# Altium PCB 100064667.PcbDoc (part 1 of 2)
Units mil, origin at the board's own origin, x right, y up, seen from the top; angles counter-clockwise.
Board outline 1193.35 x 1920 mil, 8 copper layers (F.Cu, In1.Cu, In2.Cu, In3.Cu, ln4.Cu, In5.Cu, In6.Cu, B.Cu), stack 57.778 mil thick; 91 components, 64 nets, 294 pads, 112 vias.
Unrouted connection lines stored in the file: 2.
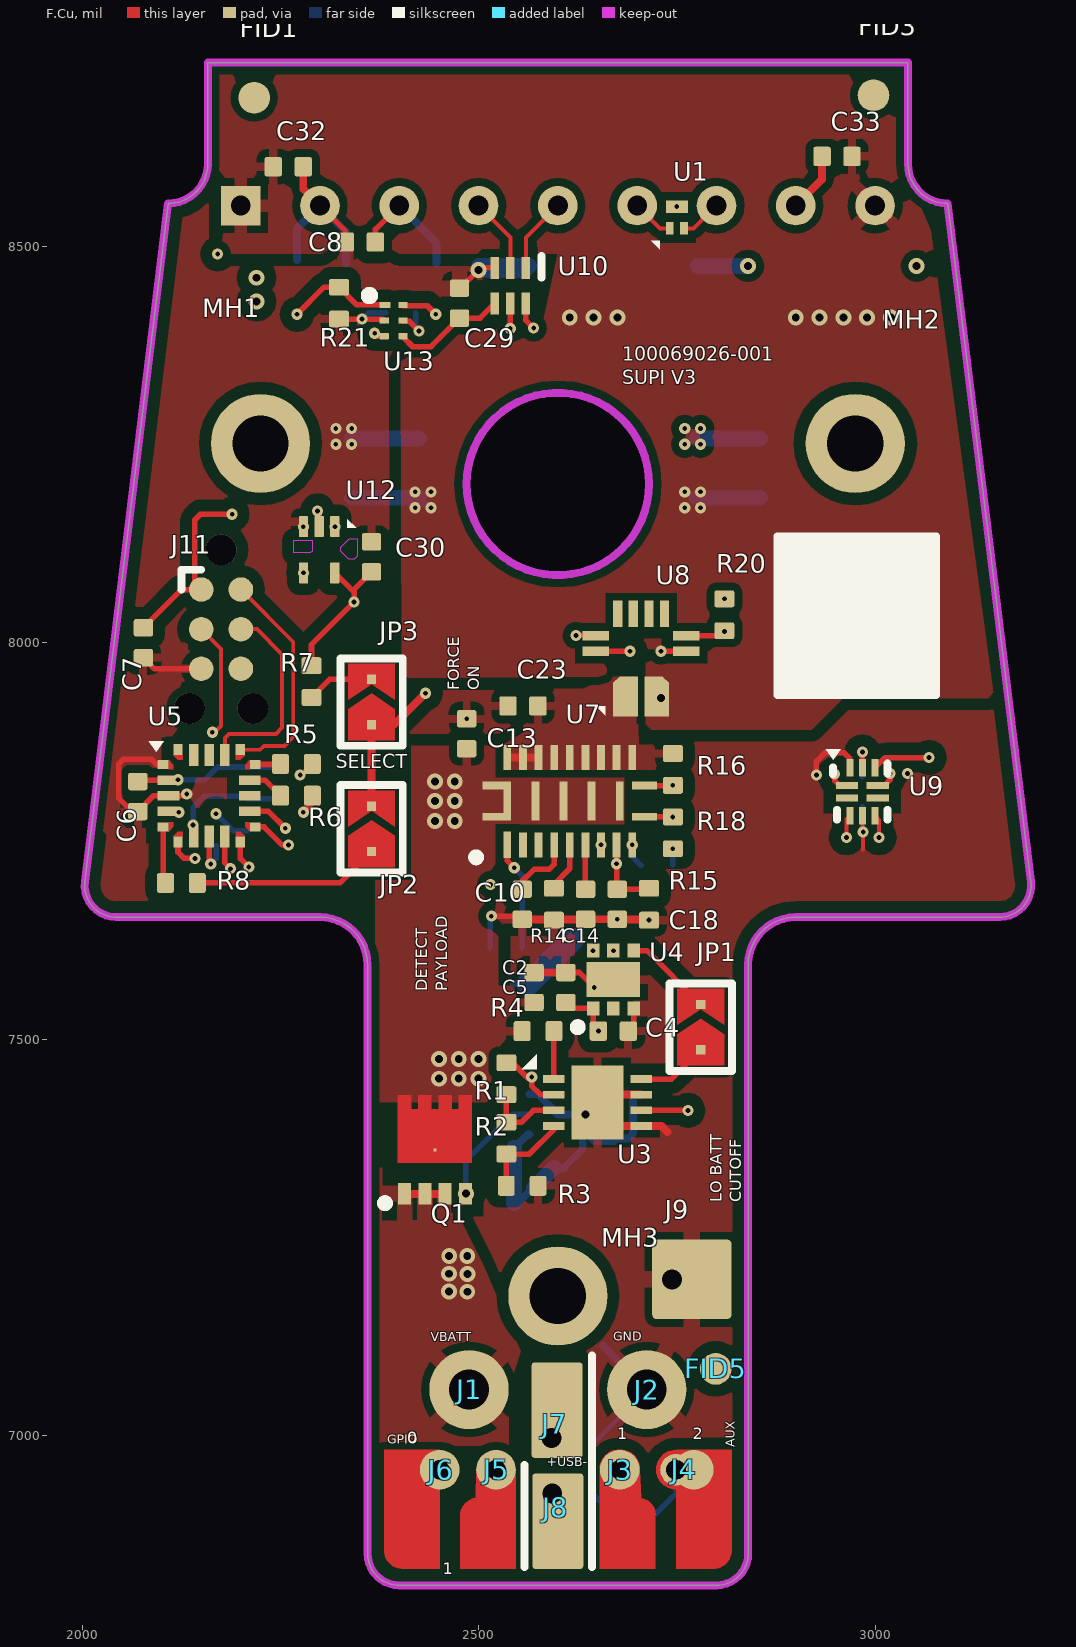
[diagram p0: F.Cu view]
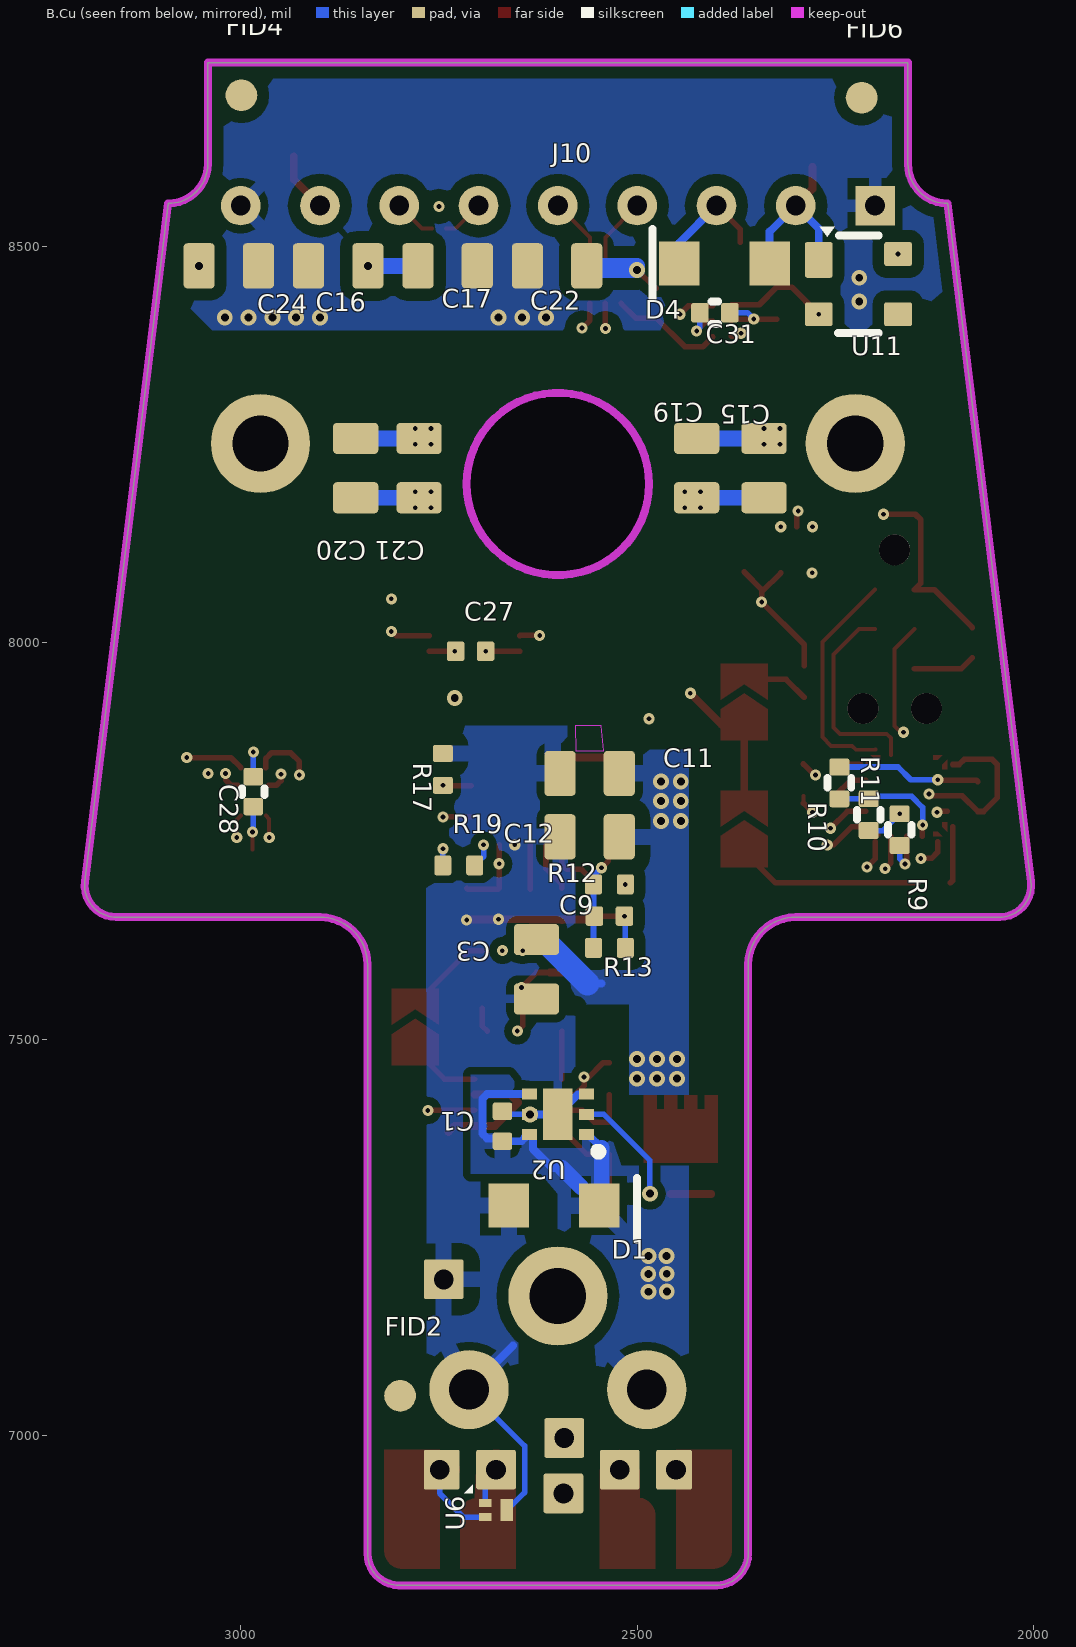
[diagram p1: B.Cu view, seen from below]
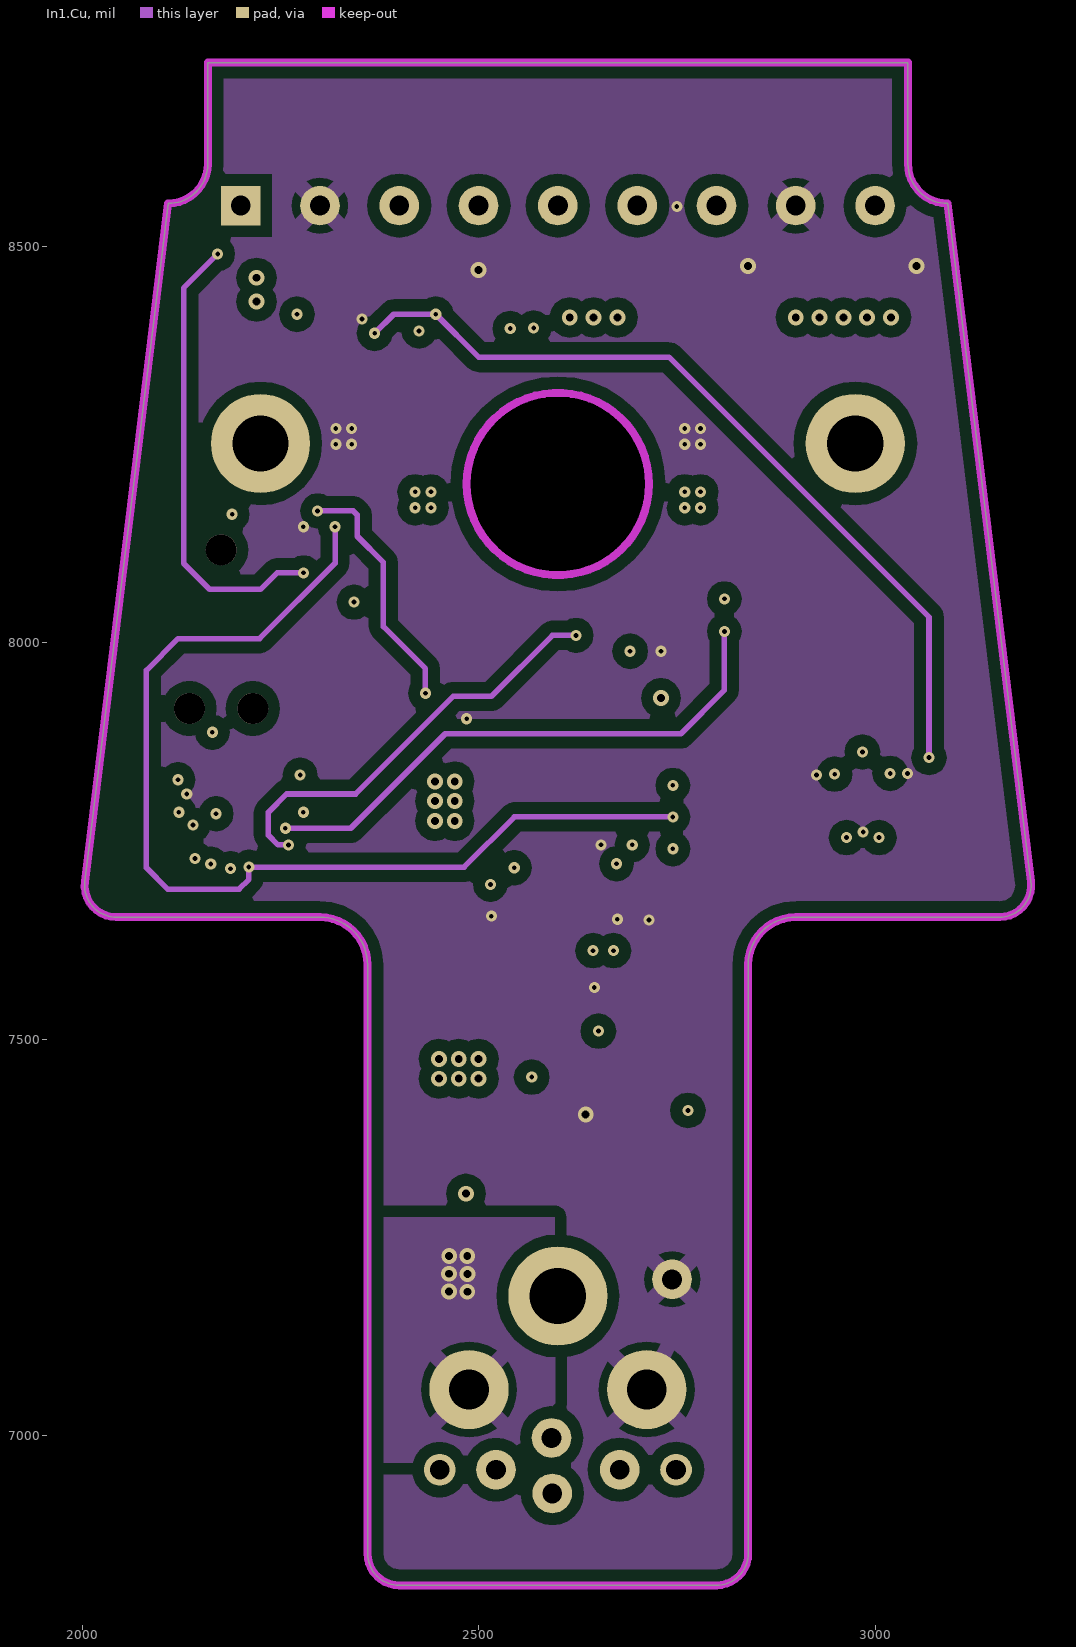
[diagram p2: In1.Cu]
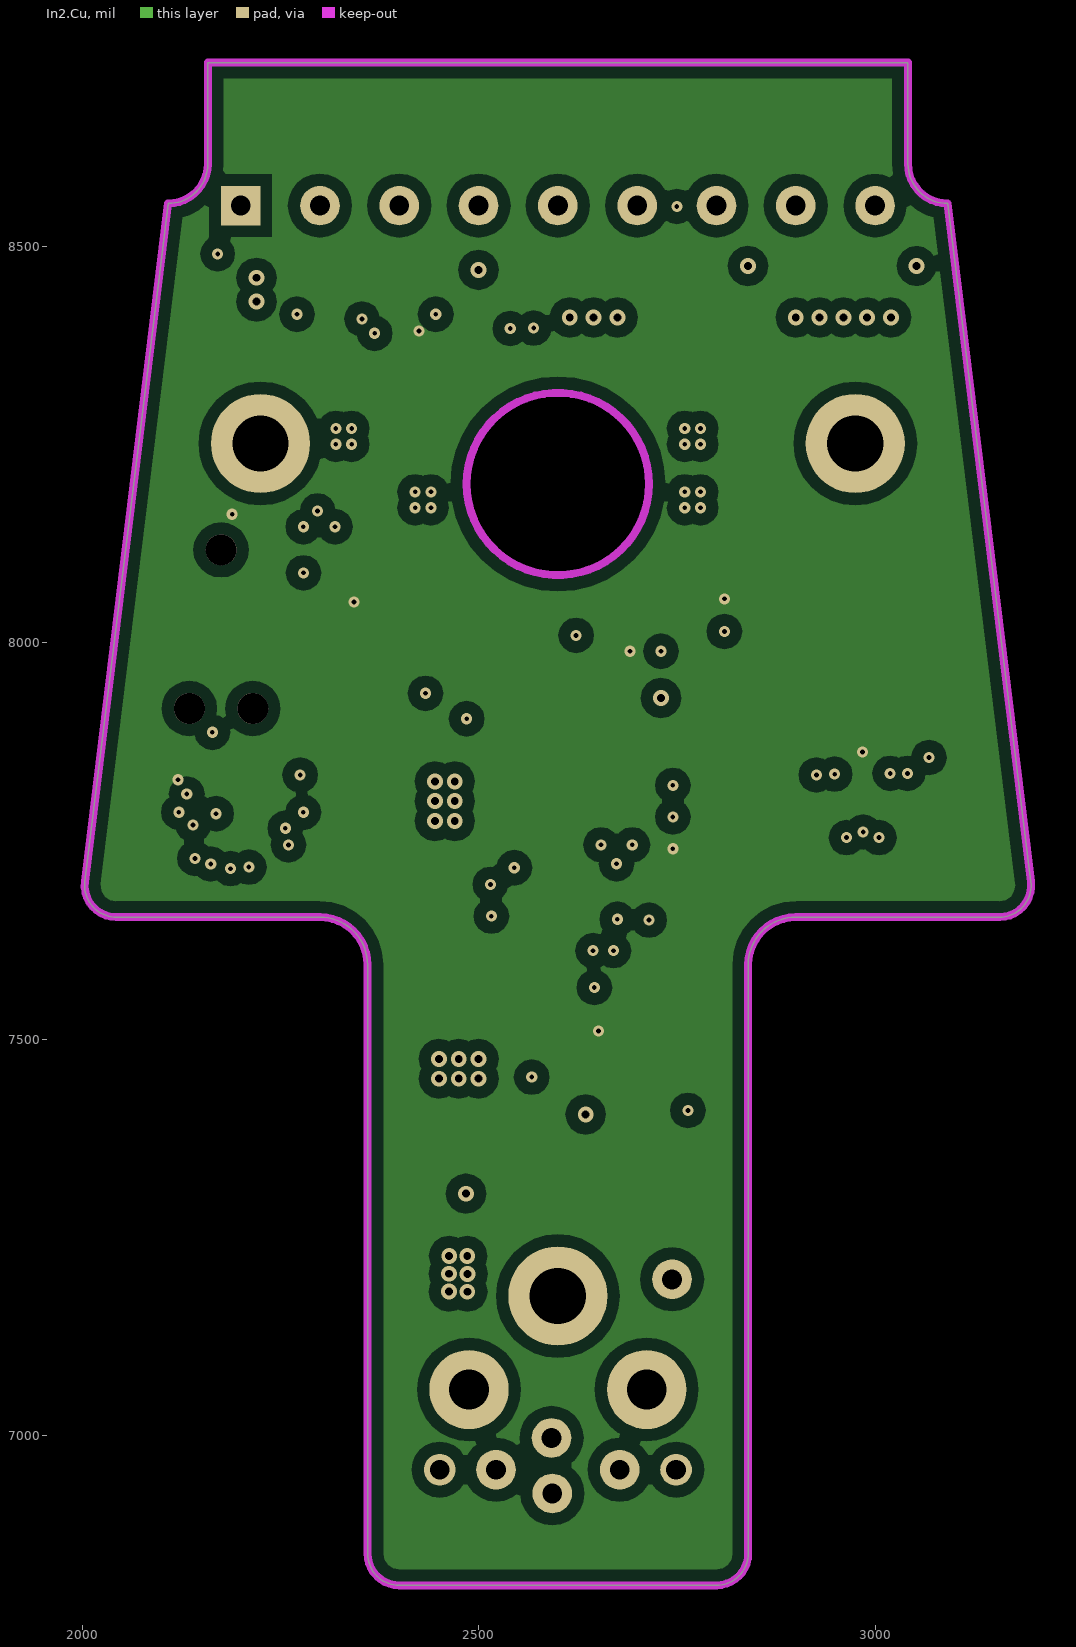
[diagram p3: In2.Cu]
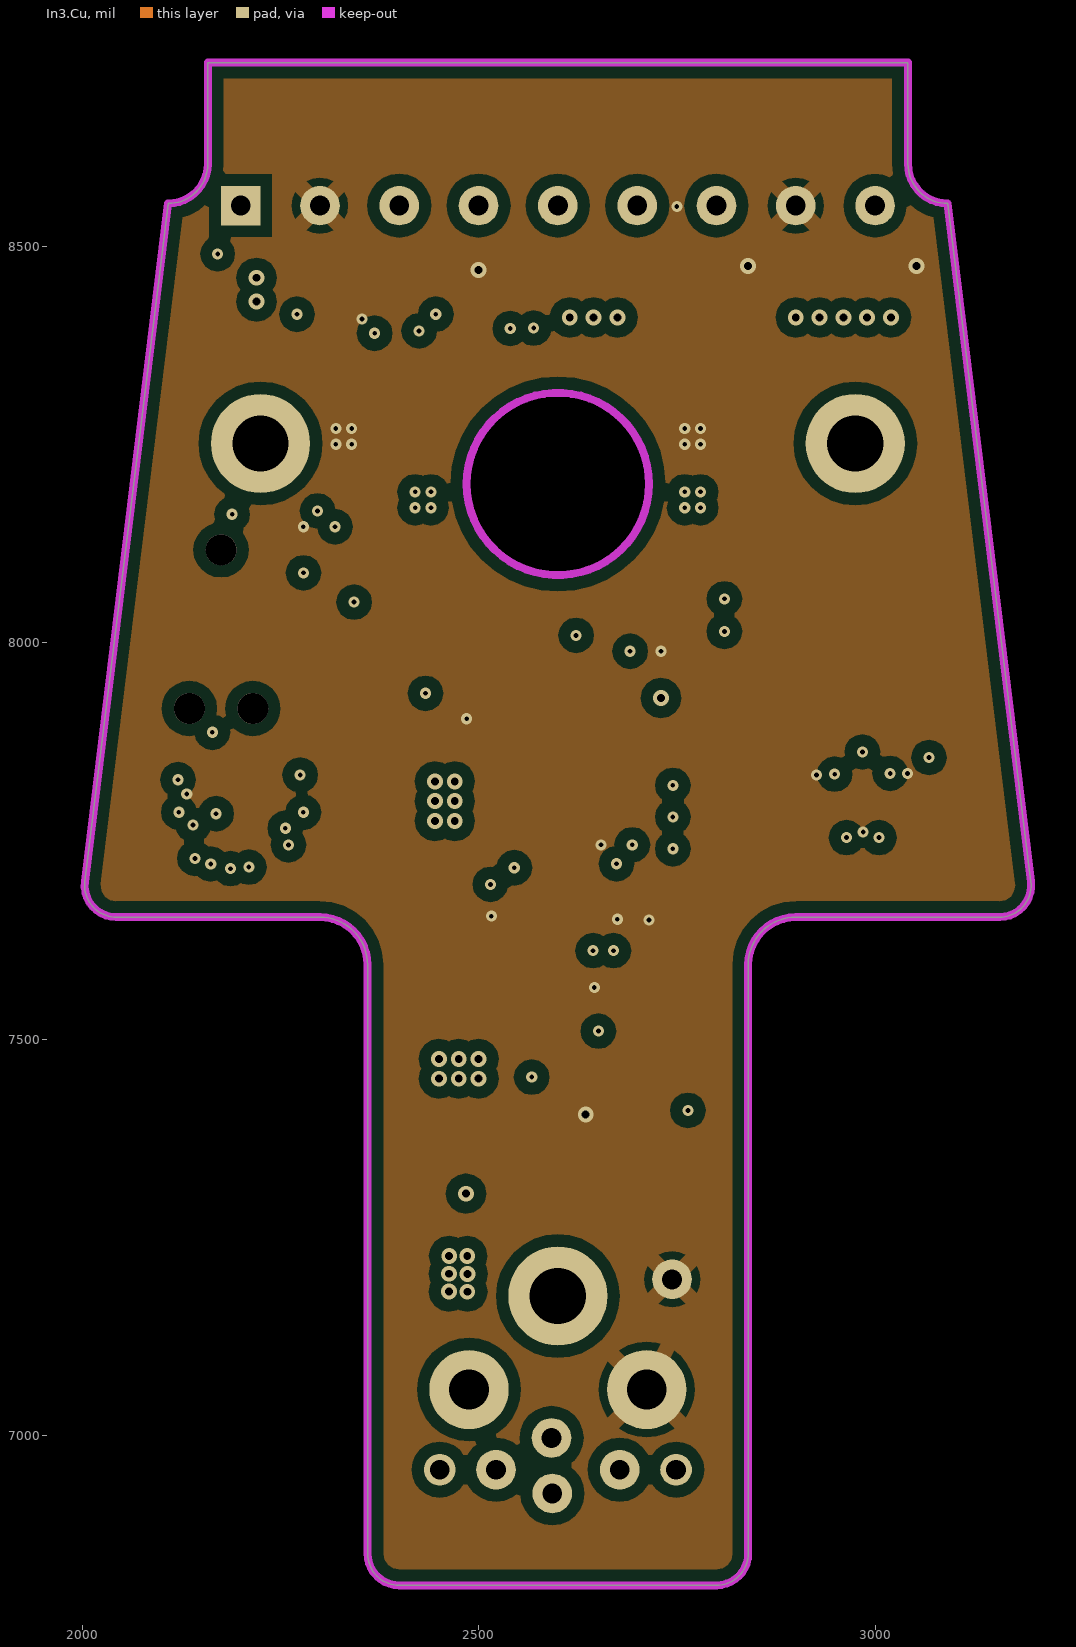
[diagram p4: In3.Cu]
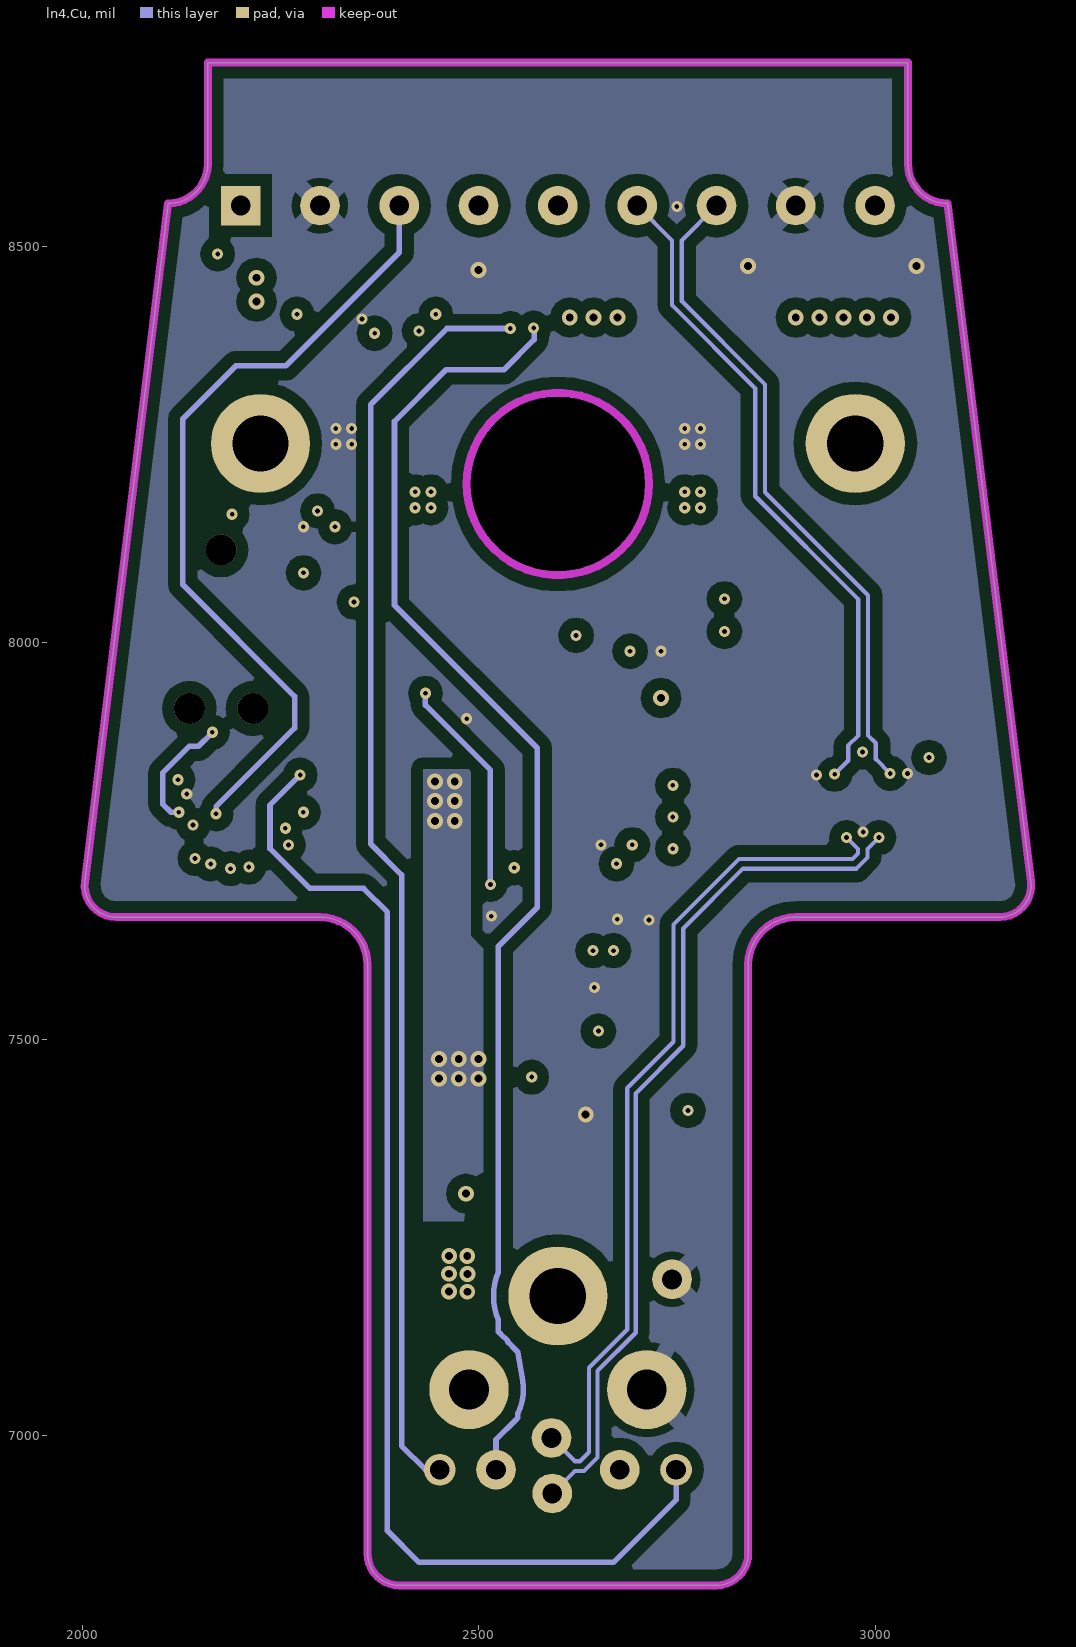
[diagram p5: ln4.Cu]
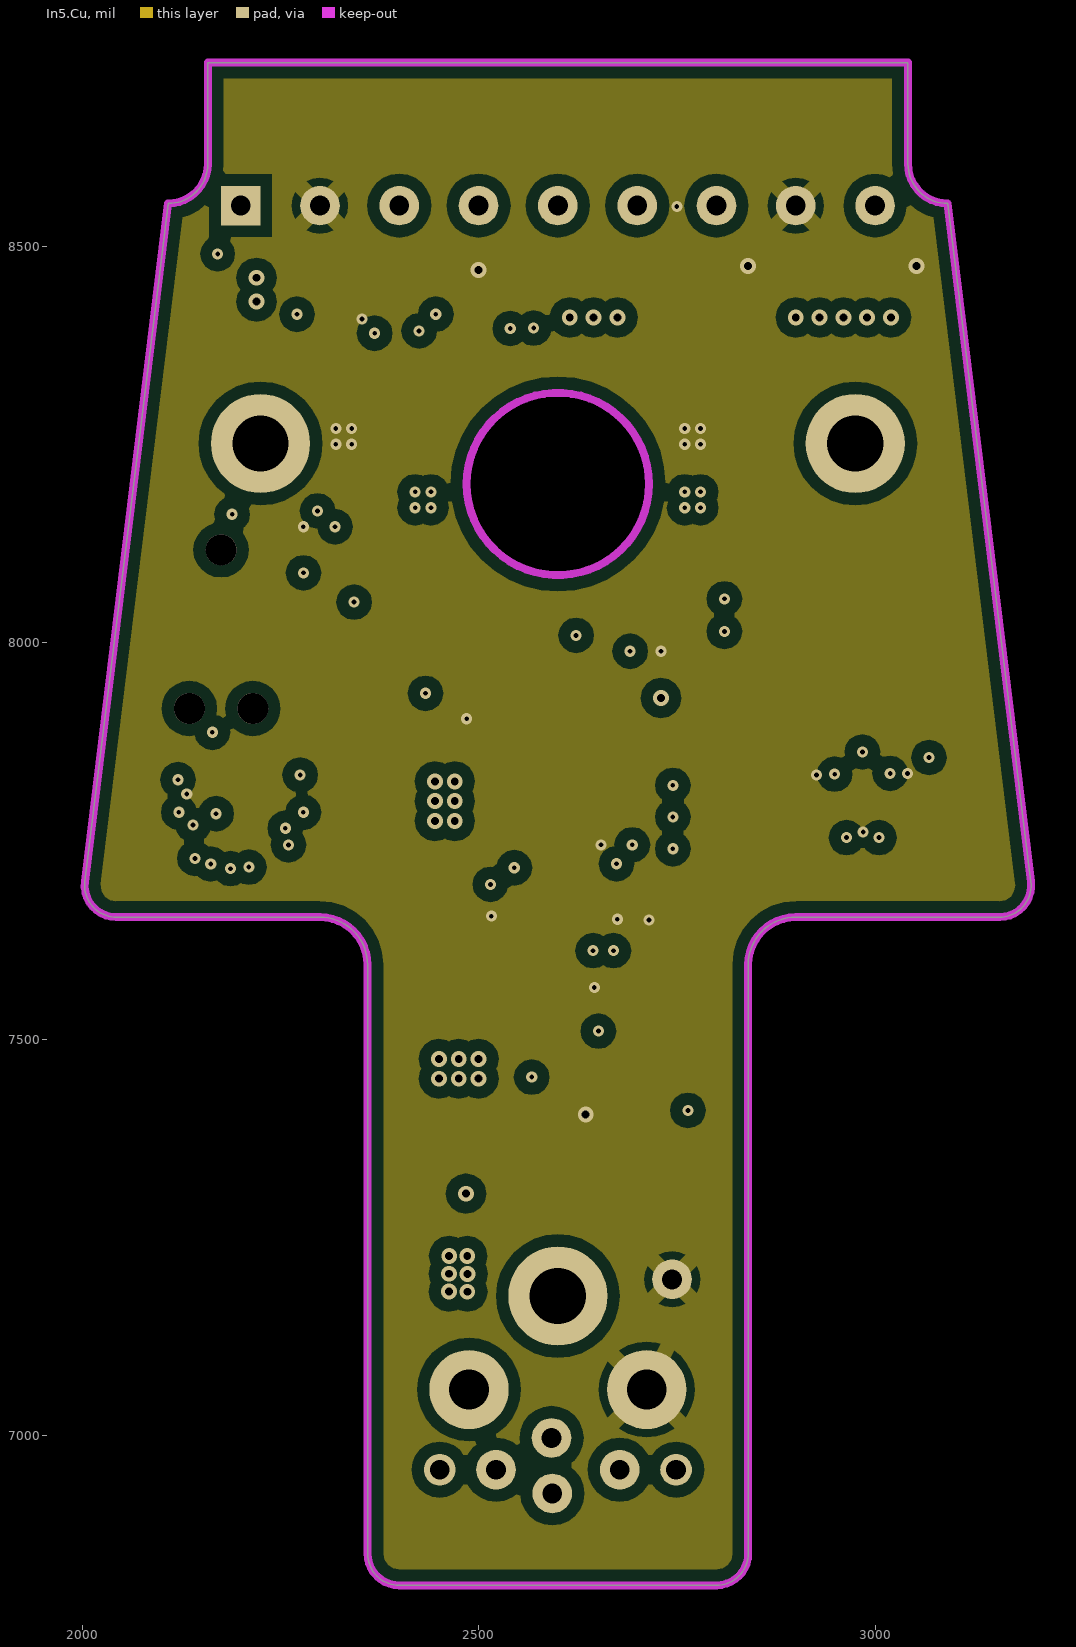
[diagram p6: In5.Cu]
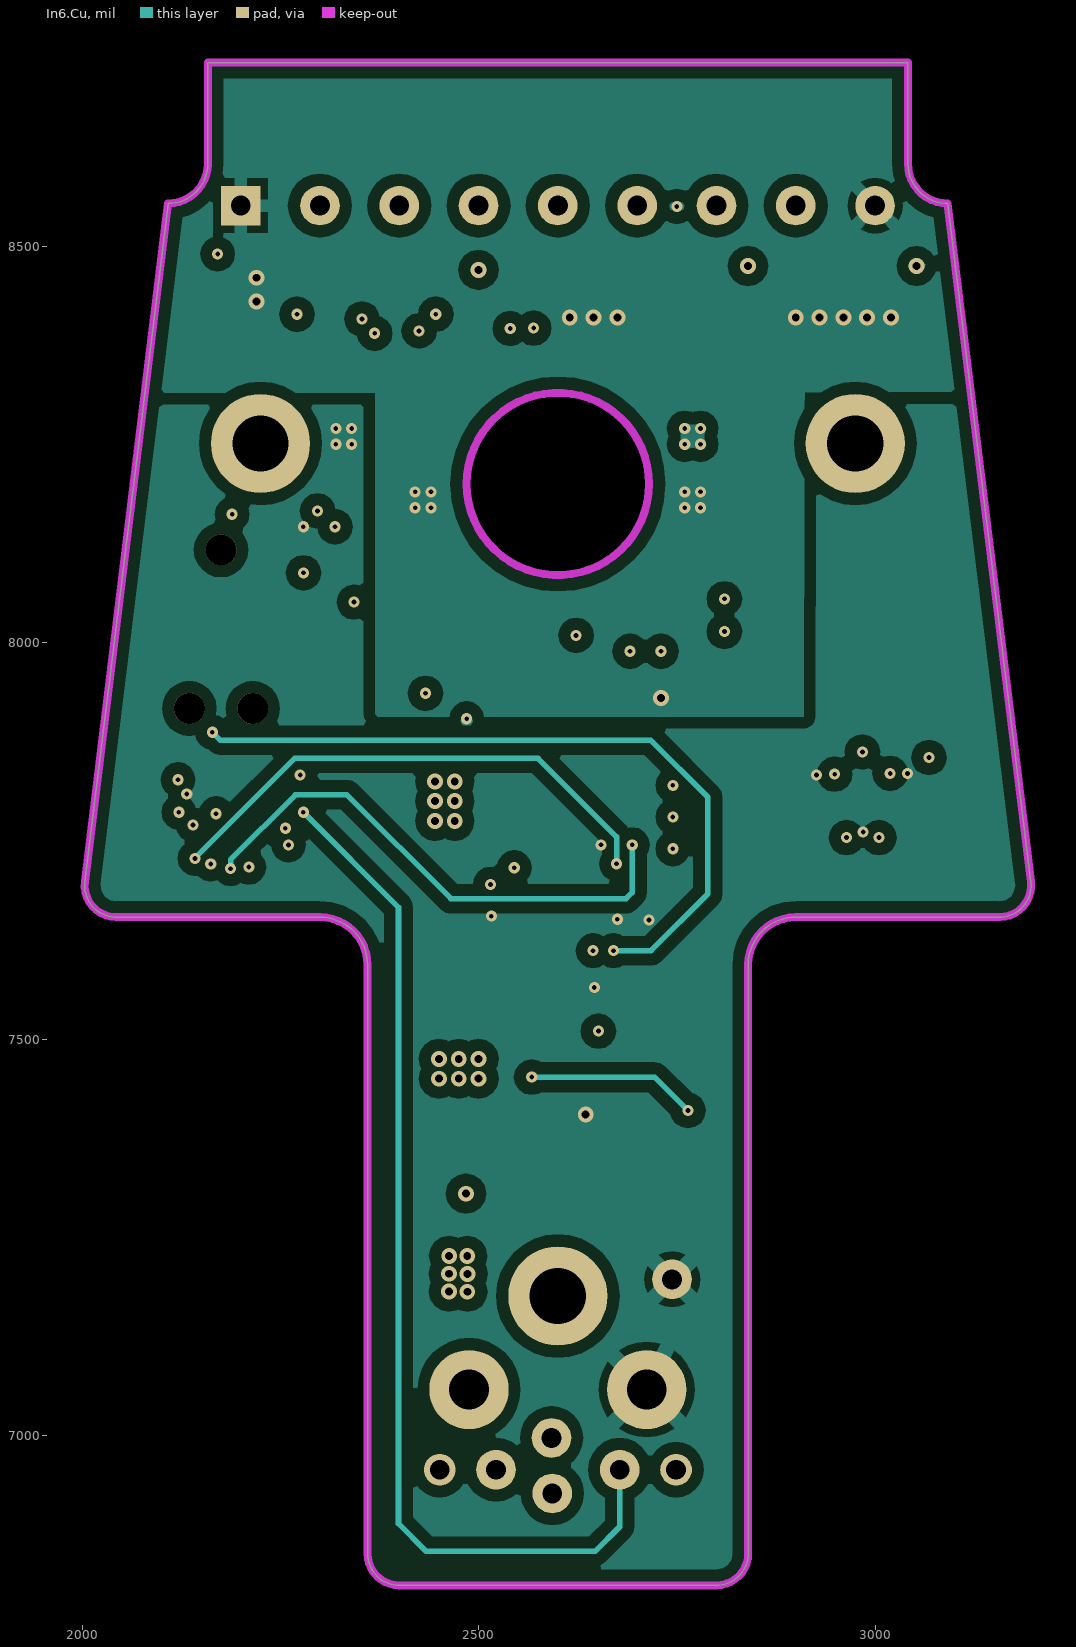
[diagram p7: In6.Cu]

## Layer stack, top to bottom
F.Mask: solder mask 0.4, Solder Resist, Dk 3.5
F.Cu: signal copper 0.689
Dielectric 1: dielectric 4.6, 370HR, Dk 4.8
In1.Cu: signal copper 1.4
Dielectric2: dielectric 8, 370HR, Dk 4.8
In2.Cu: signal copper 1.4
Dielectric3: dielectric 7.8, 370HR, Dk 4.8
In3.Cu: signal copper 1.4
Dielectric4: dielectric 8, 370HR, Dk 4.8
ln4.Cu: signal copper 1.4
Dielectric5: dielectric 7, 370HR, Dk 4.8
In5.Cu: signal copper 1.4
Dielectric6: dielectric 8, 370HR, Dk 4.8
In6.Cu: signal copper 1.4
Dielectric7: dielectric 4.6, 370HR, Dk 4.8
B.Cu: signal copper 0.689
B.Mask: solder mask 0.4, Solder Resist, Dk 3.5

## Board outline
2043.28,7653.7 2300,7653.7 cw(c2300,7593.7) 2360,7593.7 2360,6850.88 ccw(c2400,6851.18) 2400,6811.18 2800.19,6811.18 ccw(c2800,6851.18) 2840,6851.18 2840,7593.7 cw(c2900,7593.7) 2900,7653.7 3156.72,7653.7 ccw(c3156.72,7693.7) 3196.42,7698.58 3102.2,8465.93 3091.43,8553.7 cw(c3091.43,8603.7) 3041.43,8603.7 3041.43,8731.18 2158.57,8731.18 2158.57,8603.7 cw(c2108.57,8603.7) 2108.57,8553.7 2097.8,8465.93 2003.58,7698.58 ccw(c2043.28,7693.7)
cut-out: 2715.36,8200 2713.94,8218.05 2709.71,8235.65 2702.78,8252.37 2693.32,8267.8 2681.57,8281.57 2667.8,8293.32 2652.37,8302.78 2635.65,8309.71 2618.05,8313.94 2600,8315.36 2581.95,8313.94 2564.35,8309.71 2547.63,8302.78 2532.2,8293.32 2518.43,8281.57 2506.68,8267.8 2497.22,8252.37 2490.29,8235.65 2486.06,8218.05 2484.64,8200 2486.06,8181.95 2490.29,8164.35 2497.22,8147.63 2506.68,8132.2 2518.43,8118.43 2532.2,8106.68 2547.63,8097.22 2564.35,8090.29 2581.95,8086.06 2600,8084.64 2618.05,8086.06 2635.65,8090.29 2652.37,8097.22 2667.8,8106.68 2681.57,8118.43 2693.32,8132.2 2702.78,8147.63 2709.71,8164.35 2713.94,8181.95 2715.36,8200

## Design rules (kind name [scope] priority, off if disabled: settings)
Clearance "Clearence 0.762_PadClass" [InPadClass('Pad Class Clearance 0.762')] p1: gap=15 ignorepadtopadclearanceinfootprint=FALSE
Clearance "Clearence 0.508_Polygon" [InNamedPolygon('In2.Cu-/Block Diagram/Data Switches/P3V3')] p2: gap=15 ignorepadtopadclearanceinfootprint=FALSE
Clearance "Clearence 0.508_PadClass" [InPadClass('Pad Class Clearance 0.508')] p3: gap=15 ignorepadtopadclearanceinfootprint=FALSE
Clearance "Clearence 0.381_Polygon" [InNamedPolygon('F.Cu-GND-1') OR InNamedPolygon('In1.Cu-GND') OR InNamedPolygon('In3.Cu-GND') OR InNamedPolygon('In4.Cu-GND') OR InNamedPolygon('In5.Cu-GND') OR InNamedPolygon('In6.Cu-GND') OR InNamedPolygon('In1.Cu-/Block Diagram/VBATT') OR InNamedPolygon('In4.Cu-/Block Diagram/Payload Power Control/VBATT_PROT') OR InNamedPolygon('In6.Cu-/Block Diagram/Payload Power Control/VOUT') OR  InNamedPolygon('B.Cu-/Block Diagram/Payload Power Control/VBATT_PROT') OR InNamedPolygon('B.Cu-/Block Diagram/Payload Power Control/VOUT')] p4: gap=15 ignorepadtopadclearanceinfootprint=FALSE
Clearance "Clearence 0.254_Polygon" [InNamedPolygon('F.Cu-/Block Diagram/VBATT') OR InNamedPolygon('F.Cu-Net-(U7-PD)') OR InNamedPolygon('F.Cu-GND') OR InNamedPolygon('F.Cu-/Block Diagram/Payload Power Control/VOUT') OR InNamedPolygon('F.Cu-/Block Diagram/Payload Power Control/VBATT_PROT') OR InNamedPolygon('B.Cu-/Block Diagram/VBATT') OR InNamedPolygon('B.Cu-GND')] p5: gap=10 ignorepadtopadclearanceinfootprint=FALSE
Clearance "Clearence 0.254_PadClass" [InPadClass('Pad Class Clearance 0.254')] p6: gap=10 ignorepadtopadclearanceinfootprint=FALSE
Clearance "Clearence 0.1524_PadClass" [InPadClass('Pad Class Clearance 0.1524')] p7: gap=6 ignorepadtopadclearanceinfootprint=FALSE
Clearance "Clearence 0.14_PadClass" [InPadClass('Pad Class Clearance 0.14')] p8: gap=5.51 ignorepadtopadclearanceinfootprint=FALSE
MinimumAnnularRing [All] p1: minimumring=7.5
MinimumSolderMaskSliver [All] p1: minsoldermaskwidth=4
PlaneClearance [All] p1: clearance=15
PlaneConnect [All] p1: planeconnectstyle=Direct reliefexpansion=20 reliefentries=4 reliefconductorwidth=10 reliefairgap=10
PolygonConnect Polygon_B.Cu-GND_ConnectDirect [IsNamedPolygon('B.Cu-GND') vs IsVia] p1: connectstyle=Direct reliefconductorwidth=10 reliefentries=4 polygonreliefangle="90 Angle" airgapwidth=10
PolygonConnect Polygon_B.Cu-GND_ConnectRelief45 [IsNamedPolygon('B.Cu-GND') vs (IsThruPin or IsSMTPin) and (PadShape_AllLayers = 'Round')] p2: connectstyle=Relief reliefconductorwidth=20 reliefentries=4 polygonreliefangle="45 Angle" airgapwidth=20
PolygonConnect Polygon_B.Cu-GND_ConnectRelief90 [IsNamedPolygon('B.Cu-GND') vs (IsThruPin or IsSMTPin) and (PadShape_AllLayers <> 'Round')] p3: connectstyle=Relief reliefconductorwidth=20 reliefentries=4 polygonreliefangle="90 Angle" airgapwidth=20
PolygonConnect "Polygon_B.Cu-/Block Diagram/Payload Power Control/VOUT_ConnectDirect" [IsNamedPolygon('B.Cu-/Block Diagram/Payload Power Control/VOUT')] p4: connectstyle=Direct reliefconductorwidth=10 reliefentries=4 polygonreliefangle="90 Angle" airgapwidth=10
PolygonConnect "Polygon_B.Cu-/Block Diagram/Payload Power Control/VBATT_PROT_ConnectDirect" [IsNamedPolygon('B.Cu-/Block Diagram/Payload Power Control/VBATT_PROT') vs IsVia] p5: connectstyle=Direct reliefconductorwidth=10 reliefentries=4 polygonreliefangle="90 Angle" airgapwidth=10
PolygonConnect "Polygon_B.Cu-/Block Diagram/Payload Power Control/VBATT_PROT_ConnectRelief45" [IsNamedPolygon('B.Cu-/Block Diagram/Payload Power Control/VBATT_PROT') vs (IsThruPin or IsSMTPin) and (PadShape_AllLayers = 'Round')] p6: connectstyle=Relief reliefconductorwidth=19.68 reliefentries=4 polygonreliefangle="45 Angle" airgapwidth=19.68
PolygonConnect "Polygon_B.Cu-/Block Diagram/Payload Power Control/VBATT_PROT_ConnectRelief90" [IsNamedPolygon('B.Cu-/Block Diagram/Payload Power Control/VBATT_PROT') vs (IsThruPin or IsSMTPin) and (PadShape_AllLayers <> 'Round')] p7: connectstyle=Relief reliefconductorwidth=19.68 reliefentries=4 polygonreliefangle="90 Angle" airgapwidth=19.68
PolygonConnect "Polygon_B.Cu-/Block Diagram/VBATT_ConnectDirect" [IsNamedPolygon('B.Cu-/Block Diagram/VBATT') vs IsVia] p8: connectstyle=Direct reliefconductorwidth=10 reliefentries=4 polygonreliefangle="90 Angle" airgapwidth=10
PolygonConnect "Polygon_B.Cu-/Block Diagram/VBATT_ConnectRelief45" [IsNamedPolygon('B.Cu-/Block Diagram/VBATT') vs (IsThruPin or IsSMTPin) and (PadShape_AllLayers = 'Round')] p9: connectstyle=Relief reliefconductorwidth=20 reliefentries=4 polygonreliefangle="45 Angle" airgapwidth=10
PolygonConnect "Polygon_B.Cu-/Block Diagram/VBATT_ConnectRelief90" [IsNamedPolygon('B.Cu-/Block Diagram/VBATT') vs (IsThruPin or IsSMTPin) and (PadShape_AllLayers <> 'Round')] p10: connectstyle=Relief reliefconductorwidth=20 reliefentries=4 polygonreliefangle="90 Angle" airgapwidth=10
PolygonConnect "Polygon_In6.Cu-/Block Diagram/Payload Power Control/VOUT_ConnectDirect" [IsNamedPolygon('In6.Cu-/Block Diagram/Payload Power Control/VOUT') vs IsVia] p11: connectstyle=Direct reliefconductorwidth=10 reliefentries=4 polygonreliefangle="90 Angle" airgapwidth=10
PolygonConnect "Polygon_In6.Cu-/Block Diagram/Payload Power Control/VOUT_ConnectRelief45" [IsNamedPolygon('In6.Cu-/Block Diagram/Payload Power Control/VOUT') vs (IsThruPin or IsSMTPin) and (PadShape_AllLayers = 'Round')] p12: connectstyle=Relief reliefconductorwidth=20 reliefentries=4 polygonreliefangle="45 Angle" airgapwidth=10
PolygonConnect "Polygon_In6.Cu-/Block Diagram/Payload Power Control/VOUT_ConnectRelief90" [IsNamedPolygon('In6.Cu-/Block Diagram/Payload Power Control/VOUT') vs (IsThruPin or IsSMTPin) and (PadShape_AllLayers <> 'Round')] p13: connectstyle=Relief reliefconductorwidth=20 reliefentries=4 polygonreliefangle="90 Angle" airgapwidth=10
PolygonConnect "Polygon_In4.Cu-/Block Diagram/Payload Power Control/VBATT_PROT_ConnectDirect" [IsNamedPolygon('In4.Cu-/Block Diagram/Payload Power Control/VBATT_PROT') vs IsVia] p14: connectstyle=Direct reliefconductorwidth=10 reliefentries=4 polygonreliefangle="90 Angle" airgapwidth=10
PolygonConnect "Polygon_In4.Cu-/Block Diagram/Payload Power Control/VBATT_PROT_ConnectRelief45" [IsNamedPolygon('In4.Cu-/Block Diagram/Payload Power Control/VBATT_PROT') vs (IsThruPin or IsSMTPin) and (PadShape_AllLayers = 'Round')] p15: connectstyle=Relief reliefconductorwidth=19.68 reliefentries=4 polygonreliefangle="45 Angle" airgapwidth=19.68
PolygonConnect "Polygon_In4.Cu-/Block Diagram/Payload Power Control/VBATT_PROT_ConnectRelief90" [IsNamedPolygon('In4.Cu-/Block Diagram/Payload Power Control/VBATT_PROT') vs (IsThruPin or IsSMTPin) and (PadShape_AllLayers <> 'Round')] p16: connectstyle=Relief reliefconductorwidth=19.68 reliefentries=4 polygonreliefangle="90 Angle" airgapwidth=19.68
PolygonConnect "Polygon_In2.Cu-/Block Diagram/Data Switches/P3V3_ConnectDirect" [IsNamedPolygon('In2.Cu-/Block Diagram/Data Switches/P3V3') vs IsVia] p17: connectstyle=Direct reliefconductorwidth=10 reliefentries=4 polygonreliefangle="90 Angle" airgapwidth=10
PolygonConnect "Polygon_In2.Cu-/Block Diagram/Data Switches/P3V3_ConnectRelief45" [IsNamedPolygon('In2.Cu-/Block Diagram/Data Switches/P3V3') vs (IsThruPin or IsSMTPin) and (PadShape_AllLayers = 'Round')] p18: connectstyle=Relief reliefconductorwidth=20 reliefentries=4 polygonreliefangle="45 Angle" airgapwidth=10
PolygonConnect "Polygon_In2.Cu-/Block Diagram/Data Switches/P3V3_ConnectRelief90" [IsNamedPolygon('In2.Cu-/Block Diagram/Data Switches/P3V3') vs (IsThruPin or IsSMTPin) and (PadShape_AllLayers <> 'Round')] p19: connectstyle=Relief reliefconductorwidth=20 reliefentries=4 polygonreliefangle="90 Angle" airgapwidth=10
PolygonConnect "Polygon_In1.Cu-/Block Diagram/VBATT_ConnectDirect" [IsNamedPolygon('In1.Cu-/Block Diagram/VBATT') vs IsVia] p20: connectstyle=Direct reliefconductorwidth=10 reliefentries=4 polygonreliefangle="90 Angle" airgapwidth=10
PolygonConnect Polygon_In6.Cu-GND_ConnectDirect [IsNamedPolygon('In6.Cu-GND') vs IsVia] p21: connectstyle=Direct reliefconductorwidth=10 reliefentries=4 polygonreliefangle="90 Angle" airgapwidth=10
PolygonConnect Polygon_In6.Cu-GND_ConnectRelief45 [IsNamedPolygon('In6.Cu-GND') vs (IsThruPin or IsSMTPin) and (PadShape_AllLayers = 'Round')] p22: connectstyle=Relief reliefconductorwidth=20 reliefentries=4 polygonreliefangle="45 Angle" airgapwidth=10
PolygonConnect Polygon_In6.Cu-GND_ConnectRelief90 [IsNamedPolygon('In6.Cu-GND') vs (IsThruPin or IsSMTPin) and (PadShape_AllLayers <> 'Round')] p23: connectstyle=Relief reliefconductorwidth=20 reliefentries=4 polygonreliefangle="90 Angle" airgapwidth=10
PolygonConnect Polygon_In5.Cu-GND_ConnectDirect [IsNamedPolygon('In5.Cu-GND') vs IsVia] p24: connectstyle=Direct reliefconductorwidth=10 reliefentries=4 polygonreliefangle="90 Angle" airgapwidth=10
PolygonConnect Polygon_In5.Cu-GND_ConnectRelief45 [IsNamedPolygon('In5.Cu-GND') vs (IsThruPin or IsSMTPin) and (PadShape_AllLayers = 'Round')] p25: connectstyle=Relief reliefconductorwidth=20 reliefentries=4 polygonreliefangle="45 Angle" airgapwidth=10
PolygonConnect Polygon_In5.Cu-GND_ConnectRelief90 [IsNamedPolygon('In5.Cu-GND') vs (IsThruPin or IsSMTPin) and (PadShape_AllLayers <> 'Round')] p26: connectstyle=Relief reliefconductorwidth=20 reliefentries=4 polygonreliefangle="90 Angle" airgapwidth=10
PolygonConnect Polygon_In4.Cu-GND_ConnectDirect [IsNamedPolygon('In4.Cu-GND') vs IsVia] p27: connectstyle=Direct reliefconductorwidth=10 reliefentries=4 polygonreliefangle="90 Angle" airgapwidth=10
PolygonConnect Polygon_In4.Cu-GND_ConnectRelief45 [IsNamedPolygon('In4.Cu-GND') vs (IsThruPin or IsSMTPin) and (PadShape_AllLayers = 'Round')] p28: connectstyle=Relief reliefconductorwidth=20 reliefentries=4 polygonreliefangle="45 Angle" airgapwidth=10
PolygonConnect Polygon_In4.Cu-GND_ConnectRelief90 [IsNamedPolygon('In4.Cu-GND') vs (IsThruPin or IsSMTPin) and (PadShape_AllLayers <> 'Round')] p29: connectstyle=Relief reliefconductorwidth=20 reliefentries=4 polygonreliefangle="90 Angle" airgapwidth=10
PolygonConnect Polygon_In3.Cu-GND_ConnectDirect [IsNamedPolygon('In3.Cu-GND') vs IsVia] p30: connectstyle=Direct reliefconductorwidth=10 reliefentries=4 polygonreliefangle="90 Angle" airgapwidth=10
PolygonConnect Polygon_In3.Cu-GND_ConnectRelief45 [IsNamedPolygon('In3.Cu-GND') vs (IsThruPin or IsSMTPin) and (PadShape_AllLayers = 'Round')] p31: connectstyle=Relief reliefconductorwidth=20 reliefentries=4 polygonreliefangle="45 Angle" airgapwidth=10
PolygonConnect Polygon_In3.Cu-GND_ConnectRelief90 [IsNamedPolygon('In3.Cu-GND') vs (IsThruPin or IsSMTPin) and (PadShape_AllLayers <> 'Round')] p32: connectstyle=Relief reliefconductorwidth=20 reliefentries=4 polygonreliefangle="90 Angle" airgapwidth=10
PolygonConnect Polygon_In1.Cu-GND_ConnectDirect [IsNamedPolygon('In1.Cu-GND') vs IsVia] p33: connectstyle=Direct reliefconductorwidth=10 reliefentries=4 polygonreliefangle="90 Angle" airgapwidth=10
PolygonConnect Polygon_In1.Cu-GND_ConnectRelief45 [IsNamedPolygon('In1.Cu-GND') vs (IsThruPin or IsSMTPin) and (PadShape_AllLayers = 'Round')] p34: connectstyle=Relief reliefconductorwidth=20 reliefentries=4 polygonreliefangle="45 Angle" airgapwidth=10
PolygonConnect Polygon_In1.Cu-GND_ConnectRelief90 [IsNamedPolygon('In1.Cu-GND') vs (IsThruPin or IsSMTPin) and (PadShape_AllLayers <> 'Round')] p35: connectstyle=Relief reliefconductorwidth=20 reliefentries=4 polygonreliefangle="90 Angle" airgapwidth=10
PolygonConnect Polygon_F.Cu-GND-1_ConnectDirect [IsNamedPolygon('F.Cu-GND-1') vs IsVia] p36: connectstyle=Direct reliefconductorwidth=10 reliefentries=4 polygonreliefangle="90 Angle" airgapwidth=10
PolygonConnect Polygon_F.Cu-GND-1_ConnectRelief45 [IsNamedPolygon('F.Cu-GND-1') vs (IsThruPin or IsSMTPin) and (PadShape_AllLayers = 'Round')] p37: connectstyle=Relief reliefconductorwidth=20 reliefentries=4 polygonreliefangle="45 Angle" airgapwidth=10
PolygonConnect Polygon_F.Cu-GND-1_ConnectRelief90 [IsNamedPolygon('F.Cu-GND-1') vs (IsThruPin or IsSMTPin) and (PadShape_AllLayers <> 'Round')] p38: connectstyle=Relief reliefconductorwidth=20 reliefentries=4 polygonreliefangle="90 Angle" airgapwidth=10
PolygonConnect "Polygon_F.Cu-/Block Diagram/Payload Power Control/VBATT_PROT_ConnectDirect" [IsNamedPolygon('F.Cu-/Block Diagram/Payload Power Control/VBATT_PROT') vs IsVia] p39: connectstyle=Direct reliefconductorwidth=10 reliefentries=4 polygonreliefangle="90 Angle" airgapwidth=10
PolygonConnect "Polygon_F.Cu-/Block Diagram/Payload Power Control/VBATT_PROT_ConnectRelief45" [IsNamedPolygon('F.Cu-/Block Diagram/Payload Power Control/VBATT_PROT') vs (IsThruPin or IsSMTPin) and (PadShape_AllLayers = 'Round')] p40: connectstyle=Relief reliefconductorwidth=19.68 reliefentries=4 polygonreliefangle="45 Angle" airgapwidth=19.68
PolygonConnect "Polygon_F.Cu-/Block Diagram/Payload Power Control/VBATT_PROT_ConnectRelief90" [IsNamedPolygon('F.Cu-/Block Diagram/Payload Power Control/VBATT_PROT') vs (IsThruPin or IsSMTPin) and (PadShape_AllLayers <> 'Round')] p41: connectstyle=Relief reliefconductorwidth=19.68 reliefentries=4 polygonreliefangle="90 Angle" airgapwidth=19.68
PolygonConnect "Polygon_F.Cu-/Block Diagram/Payload Power Control/VOUT_ConnectDirect" [IsNamedPolygon('F.Cu-/Block Diagram/Payload Power Control/VOUT')] p42: connectstyle=Direct reliefconductorwidth=10 reliefentries=4 polygonreliefangle="90 Angle" airgapwidth=10
PolygonConnect Polygon_F.Cu-GND_ConnectDirect [IsNamedPolygon('F.Cu-GND') vs IsVia] p43: connectstyle=Direct reliefconductorwidth=10 reliefentries=4 polygonreliefangle="90 Angle" airgapwidth=10
PolygonConnect Polygon_F.Cu-GND_ConnectRelief45 [IsNamedPolygon('F.Cu-GND') vs (IsThruPin or IsSMTPin) and (PadShape_AllLayers = 'Round')] p44: connectstyle=Relief reliefconductorwidth=19.68 reliefentries=4 polygonreliefangle="45 Angle" airgapwidth=10
PolygonConnect Polygon_F.Cu-GND_ConnectRelief90 [IsNamedPolygon('F.Cu-GND') vs (IsThruPin or IsSMTPin) and (PadShape_AllLayers <> 'Round')] p45: connectstyle=Relief reliefconductorwidth=19.68 reliefentries=4 polygonreliefangle="90 Angle" airgapwidth=10
PolygonConnect Polygon_F.Cu-Net-(U7-PD)_ConnectDirect [IsNamedPolygon('F.Cu-Net-(U7-PD)')] p46: connectstyle=Direct reliefconductorwidth=10 reliefentries=4 polygonreliefangle="90 Angle" airgapwidth=10
PolygonConnect "Polygon_F.Cu-/Block Diagram/VBATT_ConnectDirect" [IsNamedPolygon('F.Cu-/Block Diagram/VBATT') vs IsVia] p47: connectstyle=Direct reliefconductorwidth=10 reliefentries=4 polygonreliefangle="90 Angle" airgapwidth=10
PolygonConnect "Polygon_F.Cu-/Block Diagram/VBATT_ConnectRelief45" [IsNamedPolygon('F.Cu-/Block Diagram/VBATT') vs (IsThruPin or IsSMTPin) and (PadShape_AllLayers = 'Round')] p48: connectstyle=Relief reliefconductorwidth=19.68 reliefentries=4 polygonreliefangle="45 Angle" airgapwidth=19.68
PolygonConnect "Polygon_F.Cu-/Block Diagram/VBATT_ConnectRelief90" [IsNamedPolygon('F.Cu-/Block Diagram/VBATT') vs (IsThruPin or IsSMTPin) and (PadShape_AllLayers <> 'Round')] p49: connectstyle=Relief reliefconductorwidth=19.68 reliefentries=4 polygonreliefangle="90 Angle" airgapwidth=19.68
RoutingVias [All] p1: holewidth=28 width=50 viastyle="Through Hole" minholewidth=28 minwidth=50 maxholewidth=28 maxwidth=50
SilkToSilkClearance [All] p1: silktosilkclearance=4
SilkToSolderMaskClearance [IsPad] p1: minsilkscreentomaskgap=4 clearancetoexposedcopper=TRUE
SolderMaskExpansion [All] p1: expansion=4 istentingtop=FALSE
Width [All] p1: maxlimit=393.7 minlimit=5 preferedwidth=10 minimp=50.000000 maximp=50.000000 favimp=50.000000
25 further rules are at their usual default settings.

## Classes and differential pairs
pad class "Pad Class Clearance 0.14": U4-1 U4-2 U4-3 U4-4 U4-5 U4-6 U4-7
pad class "Pad Class Clearance 0.254": FID1-Un1 FID2-Un1 FID3-Un1 FID4-Un1 FID5-Un1 FID6-Un1
pad class "Pad Class Clearance 0.1524": U8-1 U8-2 U8-3 U8-4 U8-5 U8-6 U8-7 U8-8 U8-9 U8-10 U9-1 U9-2 U9-3 U9-4 U9-5 U9-6 U9-7 U9-8 U9-9 U9-10
pad class "Pad Class Clearance 0.508": J1-1 J4-1 J7-1 J8-1
pad class "Pad Class Clearance 0.762": MH1-Un1 MH2-Un1 MH3-Un1

## Components (designator, comment, footprint, x,y, rotation, side; value= is the part's Value field where it differs from the comment)
C1 "Comment" C_0402_1005Metric#1 2670,7390 r270 bottom value="0.1uF 50V"
C2 "Comment" C_0402_1005Metric#2 2570,7565 r90 top value="0.1uF 50V"
C3 "Comment" C_0805_2012Metric 2627,7588 r90 bottom value="10uF 50V"
C4 "Comment" C_0402_1005Metric#2 2670,7510 r0 top value="10000pF 50V"
C5 "Comment" C_0402_1005Metric#2 2610,7565 r90 top value="10uF 6.3V"
C6 "Comment" C_0402_1005Metric#2 2070.32,7805.82 r270 top value="0.1uF 50V"
C7 "Comment" C_0402_1005Metric#2 2077.32,7999.82 r90 top value="0.1uF 50V"
C8 "Comment" C_0402_1005Metric#2 2351,8505 r180 top value="4700pF 50V"
C9 "Comment" C_0402_1005Metric#1 2535,7655 r0 bottom value="10uF 6.3V"
C10 "Comment" C_0402_1005Metric#2 2555,7670 r270 top value="0.33uF 10V"
C11 "Comment" C_0805_2012Metric 2560,7835 r180 bottom value="10uF 50V"
C12 "Comment" C_0805_2012Metric 2560,7755 r180 bottom value="10uF 50V"
C13 "Comment" C_0402_1005Metric#2 2485,7885 r90 top value="0.1uF 50V"
C14 "Comment" C_0402_1005Metric#2 2635,7670 r270 top value="10000pF 50V"
C15 "Comment" C_0805_2012Metric 2340,8220 r270 bottom value="22uF 35V"
C16 "Comment" C_0805_2012Metric 2877,8475 r0 bottom value="22uF 35V"
C17 "Comment" C_0805_2012Metric 2739,8475 r180 bottom value="22uF 35V"
C18 "Comment" C_0402_1005Metric#2 2675,7670 r90 top value="0.1uF 50V"
C19 "Comment" C_0805_2012Metric 2425,8220 r270 bottom value="22uF 35V"
C20 "Comment" C_0805_2012Metric 2855,8220 r270 bottom value="22uF 35V"
C21 "Comment" C_0805_2012Metric 2775,8220 r270 bottom value="22uF 35V"
C22 "Comment" C_0805_2012Metric 2601,8475 r0 bottom value="22uF 35V"
C23 "Comment" C_0402_1005Metric#2 2556,7920 r180 top value="0.1uF 50V"
C24 "Comment" C_0805_2012Metric 3015,8475 r180 bottom value="4.7uF 50V"
C27 "Comment" C_0402_1005Metric#1 2710,7989 r0 bottom value="0.1uF 50V"
C28 "Comment" C_0402_1005Metric#1 2984,7812 r90 bottom value="0.1uF 50V"
C29 "Comment" C_0402_1005Metric#2 2476,8428 r90 top value="0.1uF 50V"
C30 "Comment" C_0402_1005Metric#2 2365,8108 r90 top value="0.1uF 50V"
C31 "Comment" C_0402_1005Metric#1 2402,8416 r0 bottom value="0.1uF 50V"
C32 "Comment" C_0402_1005Metric#2 2260,8600 r0 top value="0.1uF 50V"
C33 "Comment" C_0402_1005Metric#2 2952,8613 r180 top value="0.1uF 50V"
D1 "Comment" SOD-123FL 2605,7290 r180 bottom value=26VWM
D4 "Comment" SOD-123FL 2390,8478 r0 bottom value=3.3VWM
FID1 "Comment" Fiducial_Cu0.040_Mask0.060 2217,8687 r0 top value=Fiducial
FID2 "Comment" Fiducial_Cu0.040_Mask0.060 2799,7050 r0 bottom value=Fiducial
FID3 "Comment" Fiducial_Cu0.040_Mask0.060 2998,8690 r0 top value=Fiducial
FID4 "Comment" Fiducial_Cu0.040_Mask0.060 2999,8690 r0 bottom value=Fiducial
FID5 "Comment" Fiducial_Cu0.040_Mask0.060 2799,7084 r0 top value=Fiducial
FID6 "Comment" Fiducial_Cu0.040_Mask0.060 2217,8687 r0 bottom value=Fiducial
J1 "Comment" PTH_18AWG 2488,7058 r0 top value=~
J2 "Comment" PTH_18AWG 2712,7058 r0 top value=~
J3 "Comment" PTH_24AWG_offset_L_flipped_complement 2678,6957 r270 top value=~
J4 "Comment" PTH_24AWG_offset_L_flipped 2749,6957 r90 top value=~
J5 "Comment" PTH_24AWG_offset_L_complement 2522,6957 r270 top value=~
J6 "Comment" PTH_24AWG_offset_L 2451,6957 r270 top value=~
J7 "Comment" PTH_24AWG_offset_120x64_flipped 2592,6997 r180 top value=~
J8 "Comment" PTH_24AWG_offset_120x64 2593,6927 r0 top value=~
J9 "Comment" PTH_24AWG_100_mil_square 2744,7197 r90 top value=~
J10 "Comment" 399-10-109-10-007000 2600,8551 r180 bottom value=~
J11 "Comment" Tag-Connect_TC2030-IDC-NL_2x03_P1.27mm_Vertical 2175.32,8016.82 r270 top value=Conn_ARM_SWD_TagConnect_TC2030-NL
JP1 "Comment" SolderJumper-2_P1.3mm_Open_TrianglePad1.0x1.5mm 2780,7515 r90 top value=Jumper_2_Bridged
JP2 "Comment" SolderJumper-2_P1.3mm_Open_TrianglePad1.0x1.5mm 2365,7765 r90 top value=Jumper_2_Bridged
JP3 "Comment" SolderJumper-2_P1.3mm_Open_TrianglePad1.0x1.5mm 2365,7925 r90 top value=Jumper_2_Open
MH1 "Comment" 96773A622_M1.6_screw_hole_0.125in_keepout#1 2160,8297 r0 top value=~
MH2 "Comment" 96773A622_M1.6_screw_hole_0.125in_keepout#2 3019,8283 r0 top value=~
MH3 "Comment" 96773A622_M1.6_screw_hole_0.125in_keepout#3 2596,7219 r0 top value=~
Q1 "Comment" WDFN8_3.3_x_3.3_0.65mm_p 2445,7360 r0 top value=NTTFS2D1N04HL
R1 "Comment" R_0402_1005Metric#1 2535,7450 r270 top value="787K 1% 0.1W"
R2 "Comment" R_0402_1005Metric#1 2535,7375 r270 top value="12.4K 0.1% 1/16W"
R3 "Comment" R_0402_1005Metric#1 2555,7315 r0 top value="200K 0.1% 1/16W"
R4 "Comment" R_0402_1005Metric#1 2575,7510 r0 top value="1K 1% 0.1W"
R5 "Comment" R_0402_1005Metric#1 2270.32,7846.82 r180 top value="200 1% 0.1W"
R6 "Comment" R_0402_1005Metric#1 2270.32,7806.82 r180 top value="200 1% 0.1W"
R7 "Comment" R_0402_1005Metric#1 2289.32,7950.82 r270 top value="2K 1% 0.1W"
R8 "Comment" R_0402_1005Metric#1 2125.32,7696.82 r0 top value="2K 1% 0.1W"
R9 "Comment" R_0402_1005Metric#2 2169,7764 r90 bottom value="100 1% 0.1W"
R10 "Comment" R_0402_1005Metric#2 2245,7823 r90 bottom value="499 1% 0.1W"
R11 "Comment" R_0402_1005Metric#2 2208,7783 r90 bottom value="499 1% 0.1W"
R12 "Comment" R_0402_1005Metric#2 2535,7695 r180 bottom value="20K 1% 0.1W"
R13 "Comment" R_0402_1005Metric#2 2535,7615 r0 bottom value="1M 1% 0.1W"
R14 "Comment" R_0402_1005Metric#1 2595,7670 r270 top value="10K 1% 0.1W"
R15 "Comment" R_0402_1005Metric#1 2715,7670 r270 top value="10K 1% 0.1W"
R16 "Comment" R_0402_1005Metric#3 2745,7840 r270 top value="22.1K 1% 0.1W"
R17 "Comment" R_0402_1005Metric#2 2745,7840 r270 bottom value="1070 1% 0.1W"
R18 "Comment" R_0402_1005Metric#3 2745,7760 r90 top value="100K 1% 0.1W"
R19 "Comment" R_0402_1005Metric#2 2725,7719 r0 bottom value="100K 1% 0.1W"
R20 "Comment" R_0402_1005Metric#1 2810,8035 r270 top value="10K 1% 0.1W"
R21 "Comment" R_0402_1005Metric#1 2324,8428 r270 top value="100K 1% 0.1W"
U1 "Comment" Diodes_DFN1006-3#1 2750,8536 r90 top value=~
U2 "Comment" WDFNW6_2x2_0.65p_EP 2600,7405 r270 bottom value=NCV68261
U3 "Comment" DFN-8-1EP_3x3mm_P0.5mm_EP1.66x2.38mm 2650,7420 r0 top value=LTC2965HDD
U4 "Comment" WDFN6_2x2_0.65p_1.72x1.12mm_EP 2670,7575 r0 top value=NCP730BMT330TBG
U5 "Comment" ST_UFQFPN-20_3x3mm_P0.5mm 2160.32,7806.82 r0 top value=STM32C011F6Ux
U6 "Comment" Diodes_DFN1006-3#2 2678,6906 r0 bottom value=~
U7 "Comment" QFN-22_3_x_5mm 2615,7800 r90 top value=MPQ5069GQV-AEC1-Z
U8 "Comment" Allegro_QFN-12-10-1EP_3x3mm_P0.5mm 2705,7980 r90 top value=ACS711KEXLT-15AB-T
U9 "Comment" "Toshiba UQFN-10_1.4x1.8mm_P0.4mm" 2984,7812 r0 top value=~
U10 "Comment" FC2QFN-6 2540,8450 r270 top value=~
U11 "Comment" "SOT-143 Maxim" 2221,8452 r0 bottom value=~
U12 "Comment" "SOT-553 Texas Instruments DRL" 2299,8117 r270 top value=SN74LVC1G08DRLR
U13 "Comment" "QFN-6_1.4x1mm_P0.5mm TI DRY6" 2392.91,8406 r0 top value=SN74AUP2G04DRYR

## Footprints (in the part's own frame and the unit in brackets; to place one, negate y for a bottom-side part, rotate by r counter-clockwise, add the part's x,y. Pads: shape width x height; smd on the part's side, far side on the other; paste and mask are expansions set on the pad)
399-10-109-10-007000 [mil]
  rect 50x50 hole 25 paste-99999 mask+2: 1(400,0)
  round 50 hole 25 paste-99999 mask+2: 2(300,0) 3(200,0) 4(100,0) 5(0,0) 6(-100,0) 7(-200,0) 8(-300,0) 9(-400,0)
96773A622_M1.6_screw_hole_0.125in_keepout#1 [mil]
  round 125 hole 71 paste-99999 mask+2: Un1(65,-46)
96773A622_M1.6_screw_hole_0.125in_keepout#2 [mil]
  round 125 hole 71 paste-99999 mask+2: Un1(-44,-32)
96773A622_M1.6_screw_hole_0.125in_keepout#3 [mil]
  round 125 hole 71 paste-99999 mask+2: Un1(4,-43)
Allegro_QFN-12-10-1EP_3x3mm_P0.5mm [mm]
  rect 1.07x0.8 smd mask+0.025: 1(-1.32,0.5) 2(-1.32,-0.5)
  rect 0.283x0.283 smd rot 45 mask+0.051: 1(-0.785,0.7) 2(-0.785,-0.7)
  rect 0.2x0.6 smd mask+0.025: 1(-0.685,0.4) 2(-0.685,-0.4)
  rect 0.3x0.85 smd mask+0.051: 3(0.23,-1.45)
  rect 0.3x0.85 smd mask+0.025: 4(0.73,-1.45) 9(0.73,1.45) 10(0.23,1.45)
  rect 0.85x0.3 smd mask+0.025: 5(1.43,-0.75) 6(1.43,-0.25) 7(1.43,0.25) 8(1.43,0.75)
  silkscreen extent -1.82,1.15 -1.54,1.43
C_0402_1005Metric#1 [mm]
  rrect25% 0.56x0.62 smd mask+0.051: 1(0.48,0) 2(-0.48,0)
C_0402_1005Metric#2 [mm]
  rrect25% 0.56x0.62 smd mask+0.051: 1(-0.48,0) 2(0.48,0)
C_0805_2012Metric [mm]
  rrect25% 1x1.45 smd mask+0.051: 1(0.95,0) 2(-0.95,0)
DFN-8-1EP_3x3mm_P0.5mm_EP1.66x2.38mm [mm]
  rect 0.7x0.25 smd mask+0.051: 1(-1.4,0.75) 2(-1.4,0.25) 3(-1.4,-0.25) 4(-1.4,-0.75) 5(1.4,-0.75) 6(1.4,-0.25) 7(1.4,0.25) 8(1.4,0.75)
  rect 1.66x2.38 smd paste-2.38 mask+0.051: 9(0,0)
  rect 0.64x1 on Top Paste mask-1: Un1(-0.415,0.595) Un2(-0.415,-0.595) Un3(0.415,0.595) Un4(0.415,-0.595)
  silkscreen extent -2.42,1.06 -1.94,1.54
Diodes_DFN1006-3#1 [mm]
  rect 0.4x0.25 smd mask+0.025: 1(-0.35,0.225) 2(-0.35,-0.225)
  rect 0.4x0.7 smd mask+0.051: 3(0.35,0)
  silkscreen extent -1.02,0.54 -0.74,0.82
Diodes_DFN1006-3#2 [mm]
  rect 0.4x0.25 smd mask+0.025: 1(0.35,-0.225) 2(0.35,0.225)
  rect 0.4x0.7 smd mask+0.051: 3(-0.35,0)
  silkscreen extent 0.74,-0.82 1.02,-0.54
FC2QFN-6 [mm]
  rect 0.713x0.275 smd mask+0.051: 1(-0.569,0.5) 2(-0.569,0) 3(-0.569,-0.5) 4(0.569,-0.5) 5(0.569,0) 6(0.569,0.5)
  silkscreen extent -0.95,1 -0.25,1
Fiducial_Cu0.040_Mask0.060 [mil]
  round 40 smd mask+5: Un1(0,0)
PTH_18AWG [mil]
  round 100 hole 50 paste-99999 mask+2: 1(0,0)
PTH_24AWG_100_mil_square [mil]
  round 50 hole 25 paste-99999 mask+2: 1(0,0)
  rrect10% 50x50 smd far side mask+2: 1(0,0)
  rrect10% 100x100 smd mask+2: 1(0,-25)
PTH_24AWG_offset_120x64 [mil]
  round 50 hole 25 paste-99999 mask+2: 1(0,0)
  rrect10% 50x50 smd far side mask+2: 1(0,0)
  rrect10% 64x120 smd mask+2: 1(7,-35)
PTH_24AWG_offset_120x64_flipped [mil]
  rrect10% 64x120 smd mask+2: 1(-7,-35)
  round 50 hole 25 paste-99999 mask+2: 1(0,0)
  rrect10% 50x50 smd far side mask+2: 1(0,0)
PTH_24AWG_offset_L [mil]
  rrect10% 50x45 smd far side mask+2: 1(0,2.5)
  round 40 hole 25 paste-99999 mask+2: 1(0,0)
  round 50 smd mask+2: 1(0,0)
  F.Cu region: 125,-25 125,-45 123.7,-54.9 118.33,-63.33 109.9,-68.7 100,-70 100,-70 -25,-70 -25,-43 -25,0 25,0 25,0 25,0 125,0
PTH_24AWG_offset_L_complement [mil]
  round 50 hole 25 paste-99999 mask+2: 1(0,0)
  round 50 smd mask+2: 1(0,0)
  rrect10% 50x50 smd far side mask+2: 1(0,0)
  F.Cu region: 125,-45 59.5,-45 48.48,-42.9 39.78,-35.83 35.48,-25.47 35.48,-25.47 0,-25 -25,0 0,25 125,25
PTH_24AWG_offset_L_flipped [mil]
  rrect10% 50x45 smd far side mask+2: 1(0,2.5)
  round 40 hole 25 paste-99999 mask+2: 1(0,0)
  round 50 smd mask+2: 1(0,-22.5)
  F.Cu region: 25,-43 25,-70 -103,-70 -111.76,-67.84 -119.03,-62.5 -123.7,-54.78 -125.06,-45.86 -125.06,-45.86 -125,0 25,0
  F.Cu region: 3.91,24.69 9.93,22.94 15.32,19.75 19.75,15.32 22.94,9.93 24.69,3.91 25,0 25,-45 24.69,-48.91 22.94,-54.93 19.75,-60.32 15.32,-64.75 9.93,-67.94 3.91,-69.69 0,-70 -3.91,-69.69 -9.93,-67.94 -15.32,-64.75 -19.75,-60.32 -22.94,-54.93 -24.69,-48.91 -25,-45 -25,0 -24.69,3.91 -22.94,9.93 -19.75,15.32 -15.32,19.75 -9.93,22.94 -3.91,24.69 0,25
PTH_24AWG_offset_L_flipped_complement [mil]
  round 50 hole 25 paste-99999 mask+2: 1(0,0)
  round 50 smd mask+2: 1(0,0)
  rrect10% 50x50 smd far side mask+2: 1(0,0)
  F.Cu region: 125,-25 0,-25 -9.9,-23.7 -18.33,-18.33 -23.7,-9.9 -25,0 -25,0 -23.7,9.9 -18.33,18.33 -9.9,23.7 0,25 0,25 35.96,26.82 38.58,34.6 43.97,40.78 51.31,44.44 59.5,45 59.5,45 125,45
"QFN-6_1.4x1mm_P0.5mm TI DRY6" [mm]
  rrect25% 0.35x0.2 smd mask+0.051: 1(-0.275,0.5)
  rrect25% 0.3x0.2 smd mask+0.051: 2(-0.3,0) 3(-0.3,-0.5) 4(0.3,-0.5) 5(0.3,0) 6(0.3,0.5)
  silkscreen extent -0.94,0.64 -0.61,0.96
QFN-22_3_x_5mm [mm]
  rrect0% 0.85x0.25 smd mask+0.051: 1(-1.4,2)
  rect 0.8x0.25 smd mask+0.051: 2(-1.4,1.5) 3(-1.4,1) 4(-1.4,0.5) 5(-1.4,0) 6(-1.4,-0.5) 7(-1.4,-1) 8(-1.4,-1.5) 9(-1.4,-2) 12(1.4,-2) 13(1.4,-1.5) 14(1.4,-1) 15(1.4,-0.5) 16(1.4,0) 17(1.4,0.5) 18(1.4,1) 19(1.4,1.5) 20(1.4,2)
  rect 0.25x0.8 smd mask+0.051: 10(-0.5,-2.4) 11(0.5,-2.4)
  rect 0.25x0.85 smd mask+0.051: 21(0.5,2.375) 22(-0.5,2.375)
  rect 1.25x0.25 smd mask+0.051: 23(0,2) 24(0,1.1) 25(0,0.2) 26(0,-0.7) 27(0,-1.6)
  silkscreen extent -1.94,2.86 -1.66,3.14
R_0402_1005Metric#1 [mm]
  rrect25% 0.54x0.64 smd mask+0.051: 1(-0.51,0) 2(0.51,0)
R_0402_1005Metric#2 [mm]
  rrect25% 0.54x0.64 smd mask+0.051: 1(0.51,0) 2(-0.51,0)
  silkscreen extent -0.15,-0.38 0.15,0.38
R_0402_1005Metric#3 [mm]
  rrect25% 0.54x0.64 smd mask+0.025: 1(-0.51,0) 2(0.51,0)
SOD-123FL [mm]
  rect 1.3x1.4 smd mask+0.051: 1(1.45,0) 2(-1.45,0)
  silkscreen extent 2.67,-1.1 2.67,0.89
SolderJumper-2_P1.3mm_Open_TrianglePad1.0x1.5mm [mm]
  rect 0.3x0.3 smd paste-0.3 mask+0.051: 1(-0.725,0) 2(0.725,0)
  F.Cu region: 1.225,-0.75 0.075,-0.75 0.575,0 0.075,0.75 1.225,0.75
  F.Cu region: 0.275,0 -0.225,-0.75 -1.225,-0.75 -1.225,0.75 -0.225,0.75
  silkscreen extent -1.4,-1 1.4,1
"SOT-143 Maxim" [mil]
  rrect17% 35x45 smd mask+2: 1(50,-30.5)
  rrect21% 35x30 smd mask+2: 2(50,38)
  rrect17% 35x30 smd mask+2: 3(-50,38) 4(-50,-38)
  silkscreen extent -26,-72 49,61
"SOT-553 Texas Instruments DRL" [mm]
  rrect17% 0.67x0.3 smd mask+0.025: 1(-0.74,0.5) 2(-0.74,0) 3(-0.74,-0.5)
  rrect17% 0.67x0.3 smd mask+0.051: 4(0.74,-0.5) 5(0.74,0.5)
  silkscreen extent -0.98,0.9 -0.7,1.18
ST_UFQFPN-20_3x3mm_P0.5mm [mm]
  rect 0.35x0.3 smd mask+0.025: 1(-1.475,1) 5(-1.475,-1) 11(1.475,-1) 15(1.475,1)
  rect 0.7x0.3 smd mask+0.025: 2(-1.3,0.5) 3(-1.3,0) 4(-1.3,-0.5) 12(1.3,-0.5) 13(1.3,0) 14(1.3,0.5)
  rect 0.3x0.35 smd mask+0.025: 6(-1,-1.475) 10(1,-1.475) 16(1,1.475) 20(-1,1.475)
  rect 0.3x0.7 smd mask+0.025: 7(-0.5,-1.3) 8(0,-1.3) 9(0.5,-1.3) 17(0.5,1.3) 18(0,1.3) 19(-0.5,1.3)
  F.Cu region: -1.15,1 -1.15,0.85 -1.3,0.85 -1.3,1.15
  F.Cu region: -1.15,-1 -1.3,-1.15 -1.3,-0.85 -1.15,-0.85
  F.Cu region: -0.85,-1.3 -1.15,-1.3 -1,-1.15 -0.85,-1.15
  F.Cu region: 1.15,-1.3 0.85,-1.3 0.85,-1.15 1,-1.15
  F.Cu region: 1.3,-1.15 1.15,-1 1.15,-0.85 1.3,-0.85
  F.Cu region: 1.3,0.85 1.15,0.85 1.15,1 1.3,1.15
  F.Cu region: 1,1.15 0.85,1.15 0.85,1.3 1.15,1.3
  F.Cu region: -0.85,1.15 -1,1.15 -1.15,1.3 -0.85,1.3
  silkscreen extent -1.93,1.41 -1.45,1.74
Tag-Connect_TC2030-IDC-NL_2x03_P1.27mm_Vertical [mil]
  round 31 smd paste-31 mask+2: 1(-50,-25) 2(-50,25) 3(0,-25) 4(0,25) 5(50,-25) 6(50,25)
  round 39 hole 39 unplated paste-99999 mask+2: Un1(-100,0) Un2(100,40) Un3(100,-40)
  silkscreen extent -75,-50 -50,-25
"Toshiba UQFN-10_1.4x1.8mm_P0.4mm" [mm]
  rect 0.713x0.225 smd mask+0.025: 1(-0.493,0.2) 2(-0.493,-0.2) 6(0.493,-0.2) 7(0.493,0.2)
  rect 0.225x0.563 smd mask+0.025: 3(-0.4,-0.768) 4(0,-0.768) 5(0.4,-0.768) 8(0.4,0.768) 9(0,0.768) 10(-0.4,0.768)
  silkscreen extent -1.18,-0.9 0.81,1.35
WDFN6_2x2_0.65p_1.72x1.12mm_EP [mm]
  rect 0.4x0.45 smd mask+0.025: 1(-0.65,-0.925) 2(0,-0.925) 3(0.65,-0.925) 4(0.65,0.925) 5(0,0.925) 6(-0.65,0.925)
  rect 1.72x1.12 smd mask+0.025: 7(0,0)
  silkscreen extent -1.27,-1.65 -1.02,-1.4
WDFN8_3.3_x_3.3_0.65mm_p [mm]
  rect 0.42x0.7 smd mask+0.051: 1(-0.975,-1.4) 2(-0.325,-1.4) 3(0.325,-1.4) 4(0.975,-1.4)
  rect 0.1x0.1 smd mask+0.051: 5(0,0)
  F.Cu region: 1.185,-0.4 -1.185,-0.4 -1.185,1.75 -0.765,1.75 -0.765,1.3 -0.535,1.3 -0.535,1.75 -0.115,1.75 -0.115,1.3 0.115,1.3 0.115,1.75 0.535,1.75 0.535,1.3 0.765,1.3 0.765,1.75 1.185,1.75
  silkscreen extent -1.74,-1.84 -1.46,-1.56
WDFNW6_2x2_0.65p_EP [mm]
  rect 0.35x0.48 smd mask+0.025: 1(0.65,0.91) 2(0,0.91) 3(-0.65,0.91) 4(-0.65,-0.91) 5(0,-0.91) 6(0.65,-0.91)
  rect 1.65x0.95 smd mask+0.025: 7(0,0)
  silkscreen extent 0.96,1.06 1.32,1.42